# Altium PCB clock-timer-8051.PcbDoc
Units mil, origin at the board's own origin, x right, y up, seen from the top; angles counter-clockwise.
Board outline 6000 x 4000 mil, 2 copper layers (Top Layer, Bottom Layer); 66 components, 0 nets, 225 pads, 46 vias.
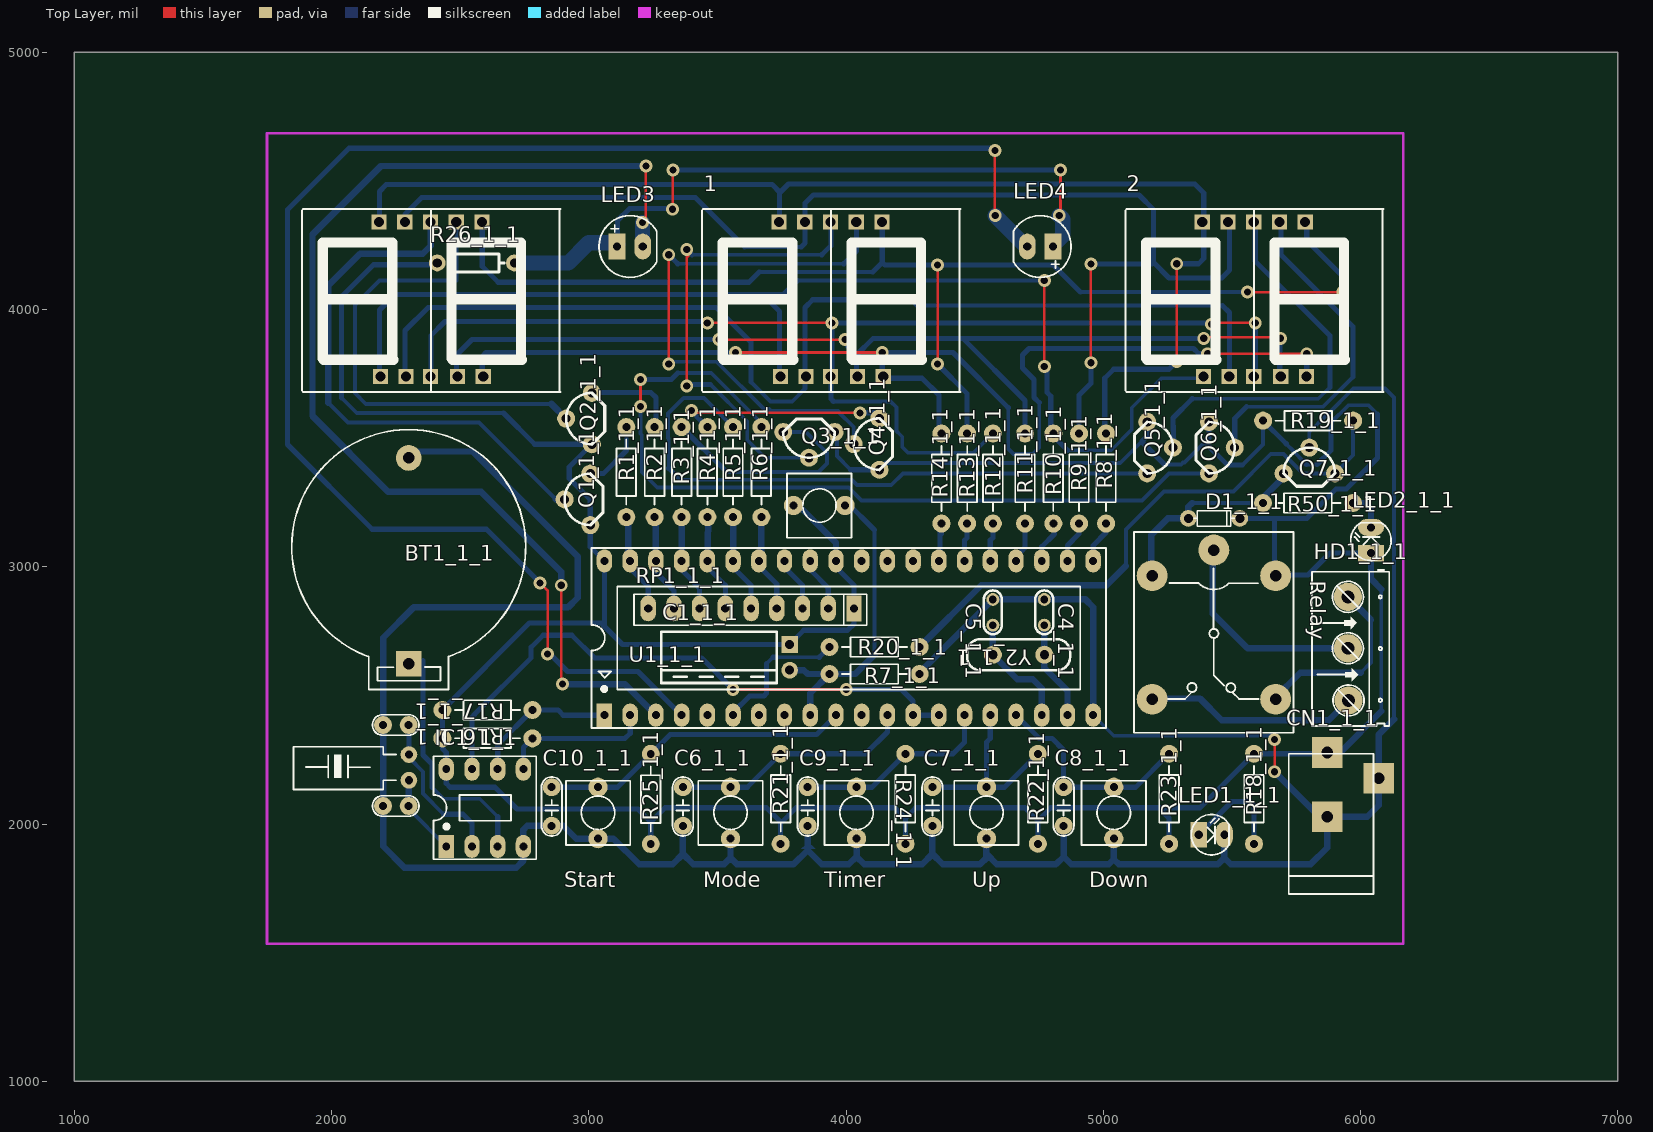
[diagram p0: Top Layer view]
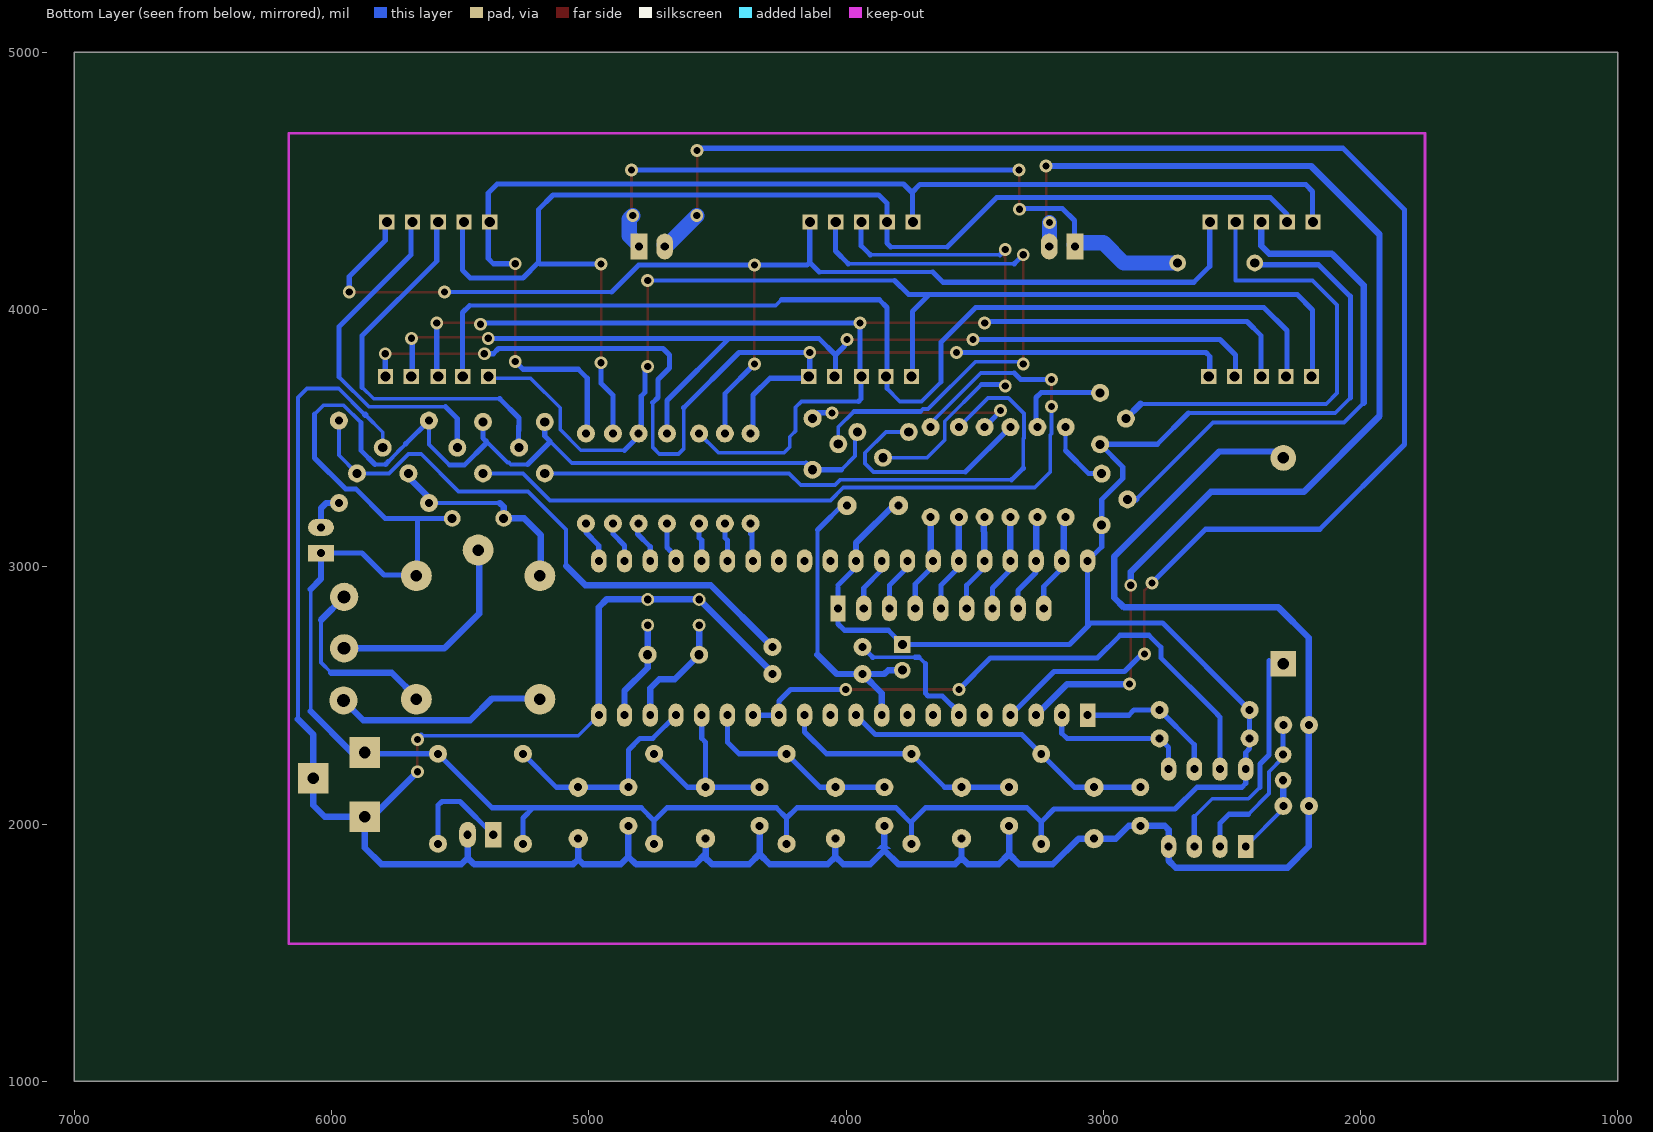
[diagram p1: Bottom Layer view, seen from below]

## Layer stack, top to bottom
Top Solder: solder mask 0.4, Solder Resist, Dk 3.5
Top Layer: signal copper 1.4
Dielectric 1: dielectric 12.6, FR-4, Dk 4.8
Bottom Layer: signal copper 1.4
Bottom Solder: solder mask 0.4, Solder Resist, Dk 3.5

## Board outline
1000,1000 7000,1000 7000,5000 1000,5000

## Design rules (kind name [scope] priority, off if disabled: settings)
Clearance [All] p1: gap=10
PolygonConnect [All] p1: connectstyle=Relief reliefconductorwidth=10 reliefentries=4 polygonreliefangle="90 Angle" airgapwidth=10
RoutingVias [All] p1: holewidth=28 width=50 viastyle="Through Hole" minholewidth=28 minwidth=50 maxholewidth=28 maxwidth=50
SolderMaskExpansion [All] p1: expansion=4
Width [All] p1: maxlimit=10 minlimit=10 preferedwidth=10
30 further rules are at their usual default settings.

## Components (designator, comment, footprint, x,y, rotation, side; value= is the part's Value field where it differs from the comment)
1 "Comment" LED7SEGX2 3690,4035 r0 top
2 "Comment" LED7SEGX2 5335,4035 r0 top
BT1_1_1 "PIN 3V" PIN3V 2300,2623 r90 top (schematic designator BT1)
C1_1_1 "10uF" RB.1/.2H 3781,2698 r270 top (schematic designator C1)
C4_1_1 "33P" RAD0.1 4771,2773 r90 top (schematic designator C4)
C5_1_1 "33P" RAD0.1 4571,2773 r90 top (schematic designator C5)
C6_1_1 "104" CN1.5 3366,1993 r90 top (schematic designator C6)
C7_1_1 "104" CN1.5 4336,1993 r90 top (schematic designator C7)
C8_1_1 "104" CN1.5 4846,1993 r90 top (schematic designator C8)
C9_1_1 "104" CN1.5 3851,1993 r90 top (schematic designator C9)
C10_1_1 "104" CN1.5 2856,1993 r90 top (schematic designator C10)
CN1_1_1 "5VDC" DC-IN 5971,2153 r90 top (schematic designator CN1)
D1_1_1 "1N4148" DIODE0.2 5331,3188 r0 top (schematic designator D1)
Down "Comment" SW2 5041,2143 r270 top
HD1_1_1 "OUT RELAY" HED3 5951,2883 r270 top (schematic designator HD1)
IC1_1_1 "DS1307" DIP8/W0.3 2446,1913 r0 top (schematic designator IC1)
LED1_1_1 "LED" LED-3 5371,1958 r0 top (schematic designator LED1)
LED2_1_1 "LED" LED-3 6041,3053 r90 top (schematic designator LED2)
LED3 "Comment" LED-5-RED 3110,4245 r0 top
LED4 "Comment" LED-5-RED 4805,4245 r180 top
Mode "Comment" SW2 3551,2143 r270 top
Q1_1_1 "C1815" TO-92/2 3006,3162 r90 top (schematic designator Q1)
Q2_1_1 "C1815" TO-92/2 3012,3476 r90 top (schematic designator Q2)
Q3_1_1 "C1815" TO-92/2 3956,3524 r180 top (schematic designator Q3)
Q4_1_1 "C1815" TO-92/2 4130,3377 r90 top (schematic designator Q4)
Q5_1_1 "C1815" TO-92/2 5171,3563 r270 top (schematic designator Q5)
Q6_1_1 "C1815" TO-92/2 5411,3563 r270 top (schematic designator Q6)
Q7_1_1 "A1015" TO-92/2 5701,3363 r0 top (schematic designator Q7)
R1_1_1 "470" R1/4W 3146,3543 r270 top (schematic designator R1)
R2_1_1 "470" R1/4W 3256,3543 r270 top (schematic designator R2)
R3_1_1 "470" R1/4W 3361,3543 r270 top (schematic designator R3)
R4_1_1 "470" R1/4W 3461,3543 r270 top (schematic designator R4)
R5_1_1 "470" R1/4W 3561,3543 r270 top (schematic designator R5)
R6_1_1 "470" R1/4W 3671,3543 r270 top (schematic designator R6)
R7_1_1 "10K" R1/4W 4286,2583 r180 top (schematic designator R7)
R8_1_1 "220" R1/4W 5011,3168 r90 top (schematic designator R8)
R9_1_1 "1k" R1/4W 4906,3168 r90 top (schematic designator R9)
R10_1_1 "1k" R1/4W 4806,3168 r90 top (schematic designator R10)
R11_1_1 "1k" R1/4W 4696,3168 r90 top (schematic designator R11)
R12_1_1 "1k" R1/4W 4571,3168 r90 top (schematic designator R12)
R13_1_1 "1k" R1/4W 4471,3168 r90 top (schematic designator R13)
R14_1_1 "1k" R1/4W 4371,3168 r90 top (schematic designator R14)
R16_1_1 "10K" R1/4W 2781,2333 r180 top (schematic designator R16)
R17_1_1 "10K" R1/4W 2781,2443 r180 top (schematic designator R17)
R18_1_1 "220" R1/4W 5586,1923 r90 top (schematic designator R18)
R19_1_1 "10K" R1/4W 5621.6,3568 r0 top (schematic designator R19)
R20_1_1 "470" R1/4W 4286,2688 r180 top (schematic designator R20)
R21_1_1 "10K" R1/4W 3746,1923 r90 top (schematic designator R21)
R22_1_1 "10K" R1/4W 4746,1923 r90 top (schematic designator R22)
R23_1_1 "10K" R1/4W 5256,1923 r90 top (schematic designator R23)
R24_1_1 "10K" R1/4W 4231,1923 r90 top (schematic designator R24)
R25_1_1 "10K" R1/4W 3241,2272.4 r270 top (schematic designator R25)
R26_1_1 "1k" AXIAL0.3 2411,4181 r0 top (schematic designator R26)
R50_1_1 "470" R1/4W 5971,3248 r180 top (schematic designator R50)
Relay "Comment" "RELAY 5" 5430,2740 r270 top
RP1_1_1 "10k" RN8 4031,2838 r180 top (schematic designator RP1)
Start "Comment" SW2 3036,2143 r270 top
Timer "Comment" SW2 4041,2143 r270 top
U1_1_1 "AT89S52" DIP40/W0.6 3061,2423 r0 top (schematic designator U1)
Up "Comment" SW2 4546,2143 r270 top
Y2_1_1 "12MHZ" XTAL1 4771,2658 r180 top (schematic designator Y2)
? "Comment" LED7SEGX2 2135,4035 r0 top
? "Comment" SW2 3996,3238 r180 top
? "Comment" CN1 2250,2070 r180 top
? "Comment" CN1 2250,2385 r180 top
? "Comment" XT32-2 2301,2170 r180 top

## Footprints (in the part's own frame and the unit in brackets; to place one, negate y for a bottom-side part, rotate by r counter-clockwise, add the part's x,y. Pads: shape width x height; smd on the part's side, far side on the other; paste and mask are expansions set on the pad)
AXIAL0.3 [mil]
  round 65 hole 35.43: 1(0,0) 2(300,0)
  silkscreen extent 40,-35 260,35
CN1 [mil]
  round 70 hole 31: 1(-50,0) 2(50,0)
  silkscreen extent -90,-40 91,40, body extent -115,-33 115,33, height 265
CN1.5 [mil]
  round 70 hole 31: 1(0,0) 2(150,0)
  silkscreen extent -40,-40 190,40, body extent -40,-33 190,33, height 235
DC-IN [mil] "Jac DC input"
  rect 120x120 hole 45: 1(125,100) 2(-125,100) 3(25,-100)
  silkscreen extent -425,-80 120,250, body extent -410,-105 134,269, height 434
DIODE0.2 [mil]
  round 65 hole 35.43: A(0,0) C(200,0)
  silkscreen extent 20,-30 180,30
DIP8/W0.3 [mil] "8 PIN, W 300mil, Pin to pin 100mil"
  rect 60x90 hole 31: 1(0,0)
  oval 60x90 hole 31: 2(100,0) 3(200,0) 4(300,0) 5(300,300) 6(200,300) 7(100,300) 8(0,300)
  silkscreen extent -50,-50 350,350, body extent -50,-40 350,336, height 201
DIP40/W0.6 [mil] "40 PIN, W 600mil, Pin to pin 100mil"
  rect 60x90 hole 31: 1(0,0)
  oval 60x90 hole 31: 2(100,0) 3(200,0) 4(300,0) 5(400,0) 6(500,0) 7(600,0) 8(700,0) 9(800,0) 10(900,0) 11(1000,0) 12(1100,0) 13(1200,0) 14(1300,0) 15(1400,0) 16(1500,0) 17(1600,0) 18(1700,0) 19(1800,0) 20(1900,0) 21(1900,600) 22(1800,600) 23(1700,600) 24(1600,600) 25(1500,600) 26(1400,600) 27(1300,600) 28(1200,600) 29(1100,600) 30(1000,600) 31(900,600) 32(800,600) 33(700,600) 34(600,600) 35(500,600) 36(400,600) 37(300,600) 38(200,600) 39(100,600) 40(0,600)
  silkscreen extent -50,-50 1950,650, body extent -82,-10 1982,600, height 224
HED3 [mil] "Header 3, 3 pin, hight 300mil, Pin to Pin 200, Colour Green"
  round 110 hole 50: 1(0,0) 2(200,0) 3(402.62,2.62)
  silkscreen extent -104,-139 502,161, body extent -94,-138 497,157, height 394
LED7SEGX2 [mm] "LED7SEG"
  round 1.524 on Top Overlay: 0(4.318,-7.112) 0(17.018,-7.112)
  rect 1.5x1.5 hole 1: 1(1.397,-7.493) 2(3.937,-7.493) 3(6.35,-7.493) 4(9.017,-7.493) 5(11.557,-7.493) 6(11.43,7.747) 7(8.89,7.747) 8(6.35,7.747) 9(3.81,7.747) 10(1.27,7.747)
  silkscreen extent -6.32,-9.02 19.18,9.02, body extent -6.35,-9.53 19.05,9.53, height 8.03
LED-3 [mil] "LED 2 PIN, 3ly Only colour"
  rect 65x100 hole 32: 1(0,0)
  oval 65x100 hole 32: 2(100,0)
  silkscreen extent -29,-78 118,79, body extent -29,-75 109,75, height 256
LED-5-RED [mil] "LED 2 PIN, 5 ly , Only colour,pin to pin 100mil"
  rect 65x100 hole 32: 1(0,0)
  oval 65x100 hole 32: 2(100,0)
  silkscreen extent -70,-120 154,120, body extent -65,-119 149,118, height 339
PIN3V [mil] "Socket PIN 3V"
  rect 100x100 hole 45: 1(0,0)
  round 100 hole 45: 2(800,0)
  silkscreen extent -100,-455 910,455, body extent -128,-447 1002,449, height 278
R1/4W [mil] "R 1/4W, 2 Pin, 350mil"
  round 70 hole 31: 1(0,0) 2(350,0)
  silkscreen extent 48,-38 302,38, body extent -40,-47 386,47, height 111
RAD0.1 [mil]
  round 50 hole 30: 1(0,0) 2(100,0)
  silkscreen extent -35,-35 135,35
RB.1/.2H [mil]
  rect 65x65 hole 35.43: 1(0,0)
  round 65 hole 35.43: 2(100,0)
  silkscreen extent -50,-500 150,-50
"RELAY 5" [mil] "Reley DPDT, 8 pin, 1A, W400mil, L800mil,H 300mil"
  round 120 hole 45: 1(-325,0) 2(255,240) 3(255,-240) 4(-225,-240) 5(-225,240)
  silkscreen extent -395,-310 385,310, body extent -371,-304 381,306, height 602
RN8 [mil] "R SIP8, 9 Pin"
  rect 60x100 hole 32: 1(0,0)
  oval 60x100 hole 32: 2(100,0) 3(200,0) 4(300,0) 5(400,0) 6(500,0) 7(600,0) 8(700,0) 9(800,0)
  silkscreen extent -50,-55 855,65, body extent -43,-44 843,5, height 259
SW2 [mil] "SW button 2pin, 250x 250 mil"
  round 75 hole 31: 1(0,0) 2(200,0)
  silkscreen extent -25,-125 225,125, body extent -18,-116 218,128, height 197
TO-92/2 [mil]
  round 70 hole 35.43: 1(0,0) 2(100,100) 3(200,0)
  silkscreen extent 0,-50 200,100
XT32-2 [mil] "Crystal 32k, 2 pin, real timer for DS1307"
  round 65 hole 32: 1(0,0) 2(0,-100)
  silkscreen extent 50,-130 449,36, body extent 6,-113 430,23, height 134
XTAL1 [mil]
  round 70 hole 35.43: 1(0,0) 2(200,0)
  silkscreen extent -100,-60 300,60

## Part data
BT1_1_1: "Battery 3VDC"
C1_1_1: library part C-POL1
C4_1_1 C5_1_1: library part CAP
C6_1_1 C7_1_1 C8_1_1 C9_1_1 C10_1_1: library part CN1, "Cap np  1pF - 472pF"
CN1_1_1: library part "DC JACK"
D1_1_1: library part DIODE
HD1_1_1: library part Hed3, "Header 3 (Green)"
IC1_1_1: "Real Timer Serial"
LED1_1_1 LED2_1_1: "LED Single colour Green and Red"
Q1_1_1 Q2_1_1 Q3_1_1 Q4_1_1 Q5_1_1 Q6_1_1: library part "NPN ECB"
Q7_1_1: library part "PNP ECB"
R1_1_1 R2_1_1 R3_1_1 R4_1_1 R5_1_1 R6_1_1 R7_1_1 R8_1_1 R9_1_1 R10_1_1 R11_1_1 R12_1_1 R13_1_1 R14_1_1 R16_1_1 R17_1_1 R18_1_1 R19_1_1 R20_1_1 R21_1_1 R22_1_1 R23_1_1 R24_1_1 R25_1_1 R50_1_1: library part R1/4W, "Resistor 1/4W"
R26_1_1: library part RES
RP1_1_1: library part RPACK-8
Y2_1_1: library part CRYSTAL

## Via types
v1: diameter 50, hole 28, Top Layer to Bottom Layer, 46 vias

## Nets (pads, with @x,y where several pads share a name; then routed paths per layer and width w, separated by ;. In a path a pad name is that pad's centre, name@x,y a point inside that pad or via, vN(x,y) a via of type N, cw(c..) or ccw(c..) an arc to the next point about the centre after c; other vN are vias at no path point)
pads on no net: 1.0 1.1 1.2 1.3 1.4 1.5 1.6 1.7 1.8 1.9 1.10 2.0 2.1 2.2 2.3 2.4 2.5 2.6 2.7 2.8 2.9 2.10 ?.0 ?.1 ?.2 ?.3 ?.4 ?.5 ?.6 ?.7 ?.8 ?.9 ?.10 BT1_1_1.1 BT1_1_1.2 C1_1_1.1 C1_1_1.2 C4_1_1.1 C4_1_1.2 C5_1_1.1 C5_1_1.2 C6_1_1.1 C6_1_1.2 C7_1_1.1 C7_1_1.2 C8_1_1.1 C8_1_1.2 C9_1_1.1 C9_1_1.2 C10_1_1.1 C10_1_1.2 CN1_1_1.1 CN1_1_1.2 CN1_1_1.3 D1_1_1.A D1_1_1.C Down.1 Down.2 HD1_1_1.1 HD1_1_1.2 HD1_1_1.3 IC1_1_1.1 IC1_1_1.2 IC1_1_1.3 IC1_1_1.4 IC1_1_1.5 IC1_1_1.6 IC1_1_1.7 IC1_1_1.8 LED1_1_1.1 LED1_1_1.2 LED2_1_1.1 LED2_1_1.2 LED3.1 LED3.2 LED4.1 LED4.2 Mode.1 Mode.2 Q1_1_1.1 Q1_1_1.2 Q1_1_1.3 Q2_1_1.1 Q2_1_1.2 Q2_1_1.3 Q3_1_1.1 Q3_1_1.2 Q3_1_1.3 Q4_1_1.1 Q4_1_1.2 Q4_1_1.3 Q5_1_1.1 Q5_1_1.2 Q5_1_1.3 Q6_1_1.1 Q6_1_1.2 Q6_1_1.3 Q7_1_1.1 Q7_1_1.2 Q7_1_1.3 R1_1_1.1 R1_1_1.2 R2_1_1.1 R2_1_1.2 R3_1_1.1 R3_1_1.2 R4_1_1.1 R4_1_1.2 R5_1_1.1 R5_1_1.2 R6_1_1.1 R6_1_1.2 R7_1_1.1 R7_1_1.2 R8_1_1.1 R8_1_1.2 R9_1_1.1 R9_1_1.2 R10_1_1.1 R10_1_1.2 R11_1_1.1 R11_1_1.2 R12_1_1.1 R12_1_1.2 R13_1_1.1 R13_1_1.2 R14_1_1.1 R14_1_1.2 R16_1_1.1 R16_1_1.2 R17_1_1.1 R17_1_1.2 R18_1_1.1 R18_1_1.2 R19_1_1.1 R19_1_1.2 R20_1_1.1 R20_1_1.2 R21_1_1.1 R21_1_1.2 R22_1_1.1 R22_1_1.2 R23_1_1.1 R23_1_1.2 R24_1_1.1 R24_1_1.2 R25_1_1.1 R25_1_1.2 R26_1_1.1 R26_1_1.2 R50_1_1.1 R50_1_1.2 Relay.1 Relay.2 Relay.3 Relay.4 Relay.5 RP1_1_1.1 RP1_1_1.2 RP1_1_1.3 RP1_1_1.4 RP1_1_1.5 RP1_1_1.6 RP1_1_1.7 RP1_1_1.8 RP1_1_1.9 Start.1 Start.2 Timer.1 Timer.2 U1_1_1.1 U1_1_1.2 U1_1_1.3 U1_1_1.4 U1_1_1.5 U1_1_1.6 U1_1_1.7 U1_1_1.8 U1_1_1.9 U1_1_1.10 U1_1_1.11 U1_1_1.12 U1_1_1.13 U1_1_1.14 U1_1_1.15 U1_1_1.16 U1_1_1.17 U1_1_1.18 U1_1_1.19 U1_1_1.20 U1_1_1.21 U1_1_1.22 U1_1_1.23 U1_1_1.24 U1_1_1.25 U1_1_1.26 U1_1_1.27 U1_1_1.28 U1_1_1.29 U1_1_1.30 U1_1_1.31 U1_1_1.32 U1_1_1.33 U1_1_1.34 U1_1_1.35 U1_1_1.36 U1_1_1.37 U1_1_1.38 U1_1_1.39 U1_1_1.40 Up.1 Up.2 Y2_1_1.1 Y2_1_1.2
copper on no net: | length 118775.6
  Top Layer w10: v1(2811,2937) 2840,2908 v1(2840,2661) ; v1(2893,2928) 2893,2549 v1(2898,2544) ; v1(3201,3623) v1(3201,3728) ; v1(3209,4338) 3222,4351 v1(3222,4558) ; v1(3311,3788) v1(3311,4213) ; v1(3325,4390) 3327,4392 v1(3327,4543) ; v1@3381,3708 3381,4203 3386,4208 ; v1(3399,3607) 3408,3598 v1(4054,3598) ; v1(3461,3948) v1(3946,3948) ; v1(3506,3883) v1(3996,3883) ; v1(3561,2523) v1(4001,2523) ; v1(3571,3833) v1@4136,3833 ; v1(4356,3788) v1(4356,4173) ; v1(4579,4618) 4579,4364 v1(4580,4365) ; v1(4771,3778) v1(4771,4113) ; v1(4829,4365) 4834,4370 v1(4834,4543) ; v1(4952,3793) v1(4952,4177) ; v1(5286,3798) v1(5286,4178) ; v1(5391,3888) 5396,3893 5686,3893 v1(5689,3888) ; v1(5406,3828) v1(5791,3828) ; v1(5421,3943) 5426,3948 v1(5591,3948) ; v1(5561,4068) v1(5931,4068) ; v1(5666,2203) v1(5666,2328)
  Bottom Layer w10: 2300,2623 2355,2623 2355,2633
  Bottom Layer w15: 1988,3637 2064,3561 2573,3561 2872,3262 ; 2039,3657 2098,3598 2668,3598 ; 2301,2058 2446,1913 ; 2301,2258 2356,2203 2356,2118 2436,2038 ; 2391,2143 2436,2098 2576,2098 2646,2028 ; 2486,4333 2486,4113 2187,4113 2091,4017 2091,3675 2133,3633 2855,3633 ; 3146,3450 3146,3543 ; v1(3201,3623) 3201,3518 3206,3513 3206,3368 3266,3308 4001,3308 4010.79,3308 4060.79,3258 5151,3258 5256,3363 5411,3363 ; 3311,3383 3311,3498 3308.5,3500.5 3308.5,3595.5 3369,3656 3448,3656 3561,3543 ; v1@3320,3797 3497,3797 3681,3613 3701,3613 3710,3604 ; 3346,3753 3476,3753 3671,3558 ; 3346,4178 3991,4178 ; 3356,3338 4023.22,3338 4043.22,3318 4176,3318 4221,3363 5171,3363 ; 3401,4213 3906,4213 ; 3473.78,3708 3616,3565.78 3616,3493 3685,3424 3863,3423 ; 3536,3368 3893,3368 3926,3401 3926,3443 3845,3524 3756,3524 ; 3606,4243 3826,4243 ; 3631,3718 3706,3643 3791,3643 3841,3693 ; 3663,4146 4104,4146 ; 3691,2623 3716,2648 ; 3731,2648 3831,2648 3896,2648 ; 3811,4113 v1(4771,4113) ; 3951,3643 4173,3643 4196,3620 4196,3528 4211,3513 4218.5,3505.5 4218.5,3465.5 4241,3443 4496,3443 4571,3518 ; 3965,3515 3965,3430 4018,3377 ; 3969,3604 4030,3543 4030,3490 ; 4111,2658 4111,2918 4111,3143 ; 4156,3403 5066,3403 5151,3488 ; 4251,4038 4273,4016 5463,4016 ; 4631,3618 4631,3458 4651,3438 4726,3438 4751,3463 4751,3638 ; 4861,3453 5031,3453 5111,3533 5111,3618 5226,3733 5391,3733 ; 4911,4068 v1(5561,4068) ; 4961,2423 5041,2343 v1@5651,2343 ; 5088,3003 5088,3145 5236,3293 5506,3293 5651,3438 5701,3438 5776,3363 5901,3363 5971.6,3433.6 5971.6,3568 ; 5238,3398 5303.41,3398 5310.45,3405.05 5316.05,3405.05 5397.5,3486.5 ; 5346,3248 5621,3248 ; 5346,3653 5836,3653 5881,3698 ; 5542,3395 5621.6,3474.6 5621.6,3568 ; 5557,3622 5855,3622 5971,3738 ; 5711.6,3477.4 5741,3448 5741,3446.89 5779.89,3408 ; 5789.89,3398 5831,3398 ; 5801,3463 5801,3523 5868.5,3590.5 ; 5869.46,3590.5 5971.96,3693 6096,3693 6131,3658 6131,2408 ; 5886,3561.08 5952.92,3628 6031,3628 6066,3593 ; 6001,2588 6041,2628 6041,2793 ; 6081,2438 6081,2913
  Bottom Layer w20: 2039,3657 2039,4053 2042,4053 2163,4174 2404,4174 2411,4181 ; 2186,3733 2186,3998 2246,4058 3676,4058 ; 2186,4333 2186,4459 2213,4486 3713,4486 3743.5,4455.5 3776,4488 5356,4488 5391,4453 5391,4333 5391,4198 5371,4178 v1(5286,4178) ; 2286,3733 2286,3918 2376,4008 3496,4008 3631,3873 3631,3718 ; 2286,4333 2286,4370 2351,4435 3414,4435 3606,4243 ; 2301,2258 2301,2278 2301,2388 ; 2356,2635.5 2356,2268 2391,2233 2391,2143 ; 2386,3733 2386,3898 2441,3953 3456,3953 v1(3461,3948) ; 2436,2038 2511,2038 2546,2003 2546,1913 2541,1913 ; 2486,3733 2486,3823 2546,3883 v1(3506,3883) ; 2546,2213 2546,2415.41 2558.26,2427.67 2558.26,2428.26 2776,2646 2776,2687 2823,2734 2934,2734 3022,2646 3438,2646 v1(3561,2523) ; 2586,3733 2586,3818 2601,3833 v1(3571,3833) ; 2586,4333 2586,4168 2648,4106 3623,4106 3663,4146 ; 2646,1913 2646,2028 ; 2646,2213 2646,2308 2781,2443 2881,2443 2901,2423 3061,2423 ; 2668,3598 2790,3476 3012,3476 2924,3388 2924,3343 3006,3261 3006,3162 3006,3078 3061,3023 3061,2768 ; 2746,2213 2746,2298 2781,2333 3141,2333 3161,2353 3161,2423 ; v1(2811,2937) 2602,3146 2158,3146 1829,3475 1829,4388 2068,4627 4570,4627 v1(4579,4618) ; v1(2840,2661) 2849,2661 2917,2593 3191,2593 3361,2423 ; 2856,2143 3036,2143 3111.6,2143 3241,2272.4 3316.6,2348 3886,2348 3961,2423 ; 3006,3362 3056.32,3362 3146.28,3451.96 ; 3012,3676 3014,3678 3241,3678 3261,3658 3261,3543 ; 3112,4251 3112,4346 3159,4393 3324,4393 3325,4392 v1(3325,4390) ; 3153,3022 3161,2993 3231,2923 3231,2838 ; v1(3201,3728) 3321,3728 3346,3753 ; 3241,1922.4 3241,2008 ; 3261,3023 3261,2978 3331,2908 3331,2838 ; 3311,3383 3356,3338 ; v1(3311,3788) v1@3320,3797 ; v1(3311,4213) 3346,4178 ; v1(3327,4543) v1(4834,4543) ; 3361,3023 3361,2988 3431,2918 3431,2838 ; 3361,3543 3536,3368 ; 3366,2143 3551,2143 3616,2143 3746,2273 4076,2273 4161,2358 4161,2423 ; v1(3381,4233) 3401,4213 ; v1@3386,3708 3473.78,3708 ; 3420.74,3583.26 3461,3543 ; 3461,3023 3461,2998 3531,2928 3531,2838 ; 3561,2423 3561,2433 3626,2498 3681,2498 3691,2508 3691,2623 ; 3561,3023 3561,2998 3631,2928 3631,2838 ; 3671,3043 3661,3003 3731,2933 3731,2838 ; 3671,3543 3671,3558 ; 3710,3604 3969,3604 ; 3716,2648 3731,2648 ; 3741,3733 3741,3993 3676,4058 ; 3741,4333 3741,4453 ; 3746,1923 3746,2003 ; 3761,3023 3761,2998 3831,2928 ; 3811,4113 3756,4058 3676,4058 ; 3826,4243 3841,4258 3841,4333 3841,4413 3873,4445 5139,4445 5196,4388 5196,4183 ; 3831,2838 3831,2929.17 ; 3841,3693 3841,3733 3841,4008 3871,4038 4251,4038 ; 3851,2143 4041,2143 4101,2143 4231,2273 4416,2273 4461,2318 4461,2423 ; 3861,3009.13 3861,2988 3929.44,2919.56 ; 3896,2648 3936,2688 ; 3906,4213 3941,4248 3941,4333 ; 3931,2838 3931,2918 ; 3951,3643 3941,3653 3941,3733 3946,3738 v1(3946,3948) 5416,3948 v1(5421,3943) ; 3956,3524 3965,3515 ; 3961,2996.78 3961,3023 ; 3961,2998 4031,2928 ; 3991,4178 4041,4228 4041,4333 ; v1(3996,3883) 4006,3858 4041,3823 ; v1(4001,2523) 4216,2523 4261,2478 4261,2423 4361,2423 ; 4001,3253 4111,3143 ; 4017,3477 4030,3490 ; 4018,3377 4130,3377 4156,3403 ; 4031,2916.23 4031,2838 4031,2778 4006,2753 3836,2753 3781,2698 3131,2698 3061,2768 ; 4041,3733 4041,3823 ; v1(4054,3598) 4055,3599 4108,3599 4130,3577 ; 4104,4146 4141,4183 ; v1@4136,3833 4141,3828 4141,3733 4296,3733 4361,3668 4361,3518 ; v1(4141,3833) 4416,3833 4631,3618 ; 4141,4333 4141,4183 ; 4231,1923 4231,2023 ; 4336,2143 4546,2143 ; v1(4356,3788) 4471,3673 4471,3518 ; 4365,3047 4365,3142 ; 4371,3128 4371,3168 ; 4426,3888 v1(5391,3888) ; 4461,3023 4461,3103 4471,3113 4471,3168 ; 4561,2423 4561,2333 4546,2318 4546,2143 ; 4561,3023 4561,3103 4571,3113 4571,3168 ; 4661,2423 4751,2333 4801,2333 4846,2288 4846,2143 5041,2143 5126,2143 5256,2273 ; 4685,3064 4696,3075 4696,3168 ; 4696,3553 4696,3646 4454,3888 4106,3888 4041,3823 ; 4746,1923 4746,2013 ; 4746,2273 4616,2143 4546,2143 ; 4751,3638 4731,3658 4731,3728 4686,3773 4686,3823 4711,3848 5351,3848 5371,3828 v1(5406,3828) ; 4761,3033.41 4761,3023 4761,3078 4810.5,3127.5 4810.5,3151.5 ; v1(4771,3778) 4782,3767 4782,3677 4796,3663 4796,3518 4861,3453 ; 4861,3023 4861,3083 4906,3128 4906,3168 ; 4906,3518 4906,3667 4952,3713 v1(4952,3793) ; 4911,4068 4806,4173 v1(4356,4173) 4151,4173 4141,4183 ; v1(4952,4177) 5190,4177 5196,4183 ; 4961,3023 4961,3083 5011,3133 5011,3168 ; 5006,3553 5006,3733 5041,3768 5256,3768 v1(5286,3798) ; 5171,3563 5171,3508 5151,3488 5151,3485 5238,3398 ; 5256,1923 5256,2023 5216,2063 ; 5274,3473 5271,3578 5346,3653 ; 5371,1958 5501,2088 5571,2088 5586,2073 5586,1923 ; 5411,3563 5411,3500 5397.5,3486.5 5397.5,3481.5 5484,3395 5542,3395 ; 5463,4016 5491,3988 5491,3733 ; 5491,4333 5491,4153 5461,4123 5256,4123 5196,4183 ; 5511,3463 5511,3576 5557,3622 ; 5531,3188 5791,3188 5906,3303 5946,3303 6066,3423 6066,3593 ; 5591,3743 v1(5591,3948) ; 5591,4333 5591,4188 5881,3898 5881,3698 ; 5621.6,3568 5711.6,3478 5711.6,3477.4 ; 5665,3188 5666,3187 5666,2968 5796,2968 5881,3053 6041,3053 ; 5686,3863 5686,3738 5691,3733 ; 5691,4333 5691,4213 5971,3933 5971,3738 ; 5779.89,3408 5789.89,3398 ; 5791,3733 v1(5791,3828) ; 5791,4333 5791,4268 5931,4128 v1(5931,4068) ; 5831,3398 5886,3453 5886,3561.08 ; 5866,2273 5586,2273 5376,2063 5216,2063 ; 5871,2278 5921,2278 ; 3061,2768 3047,2782 2770,2782 2431,2443 2431,2333 2431,2293 2446,2278 2446,2213 2446,2158 2461,2143 2636,2143 2721,2058 3191,2058 3241,2008 ; 3241,2008 3296,2063 3691,2063 3746,2008 3746,2003 ; 3746,2003 3806,2063 4191,2063 4231,2023 ; 4231,2023 4271,2063 4696,2063 4746,2013 ; 4746,2013 4796,2063 5216,2063
  Bottom Layer w25: 1988,3637 1988,4094 2111,4217 2355,4217 2386,4248 2386,4333 ; 2300,3423 2325,3448 2549,3448 2957,3040 2957,2880 2919,2842 2319,2842 2201,2724 2201,2388 2201,2068 2201,1913 2283.5,1830.5 2718.5,1830.5 2746,1858 2746,1913 2746,1978 2761,1993 2856,1993 2901,1993 2951,1943 3036,1943 3096,1943 3196,1843 3326,1843 3366,1883 ; 2301,2058 2301,2068 2301,2178 ; 2855,3633 2912,3576 ; 2872,3262 2906,3262 ; v1(2893,2928) 2893,2980 2582,3291 2221,3291 1926,3586 1926,4292 2192,4558 v1(3222,4558) ; v1(2898,2544) 3140,2544 3261,2423 ; 3153,3022 3153,3192 ; 3261,3023 3261,3193 ; 3361,3023 3361,3193 ; 3366,1993 3366,1883 ; 3461,3023 3464,3174 ; 3551,1943 3551,1868 ; 3561,3023 3562,3185 ; 3671,3043 3671,3213 ; 3781,2598 3836,2598 3851,2583 3936,2583 ; 3801,3253 3961,3093 3961,3023 ; 3851,1998 3851,1898 ; 3861,2423 3861,2508 3936,2583 ; 4041,1943 4041,1873 ; 4111,2658 4036,2583 3936,2583 ; 4286,2688 4526,2928 5013,2928 5088,3003 ; 4301,2603 4571,2873 ; 4336,1993 4336,1883 ; 4546,1943 4546,1883 ; 4571,2773 4571,2658 4666,2563 4726,2563 4761,2528 4761,2423 ; 4581,2873 4771,2873 4931,2873 4961,2843 4961,2423 ; 4771,2773 4771,2658 4771,2608 4861,2518 4861,2423 ; 4846,1993 4846,1873 ; 5041,1943 5041,1863 ; 5186,2488 5376,2488 5461,2403 5876.24,2403 5953.62,2480.38 ; 5186,2968 5186,3123 5251,3188 5331,3188 5331,3233 5346,3248 ; 5426,3068 5426,2818 5561,2683 5951,2683 ; 5471,1958 5471,1868 ; 5621,3248 5621,3268 5701,3348 5701,3363 ; v1@5651,2343 v1(5666,2328) ; v1(5666,2203) 5841,2028 5871,2028 ; 5666,2488 5766,2588 6001,2588 ; 5868.5,3590.5 5869.46,3590.5 ; 5921,2278 6081,2438 ; 5951,2883 6041,2793 ; 5971,3248 6021,3248 6041,3228 6041,3153 ; 6041,3053 6041,2953 6081,2913 ; 6131,2408 6071,2348 6071,2178 6071,2073 6026,2028 5871,2028 ; 3366,1883 3406,1843 3526,1843 3551,1868 ; 3551,1868 3576,1843 3796,1843 3851,1898 ; 3851,1898 3906,1843 4011,1843 4041,1873 ; 4041,1873 4071,1843 4296,1843 4336,1883 ; 4336,1883 4376,1843 4521,1843 4546,1868 4546,1883 ; 4546,1883 4586,1843 4816,1843 4846,1873 ; 4846,1873 4876,1843 5021,1843 5041,1863 ; 5041,1863 5061,1843 5446,1843 5471,1868 ; 5471,1868 5496,1843 5806,1843 5871,1908 5871,2028
  Bottom Layer w60: 2711,4181 2921,4181 3000,4260 3103,4260 3112,4251 ; v1(3209,4338) 3209,4254 3212,4251 ; v1(4580,4365) 4694,4251 4707,4251 ; 4807,4251 4843,4287 4843,4351 v1(4829,4365)
  other v1: 3381,3703

## Keep-outs
Keep-Out Layer:
  lines w10: 1749,1534 6166,1534 6166,4686 1749,4686 1749,1534

## Other copper
Bottom Layer:
  region: 3826,1903 3841,1918 3866,1918 3881,1903